# Altium PCB PCB1.PcbDoc
Units mil, origin at the board's own origin, x right, y up, seen from the top; angles counter-clockwise.
Board outline 6000 x 4000 mil, 2 copper layers (Top Layer, Bottom Layer); 1 components, 0 nets, 32 pads, 0 vias.
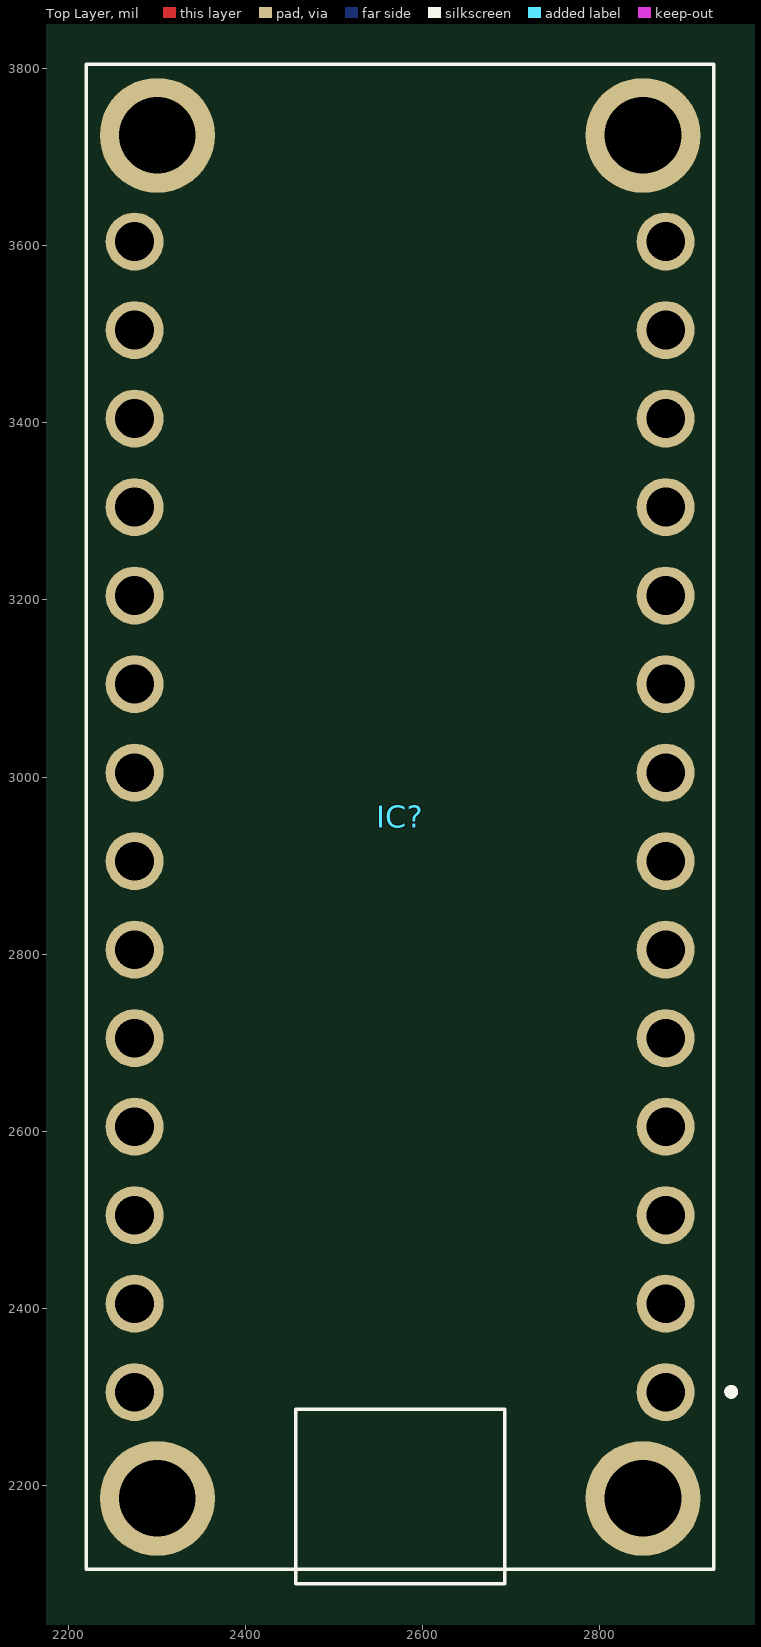
[diagram p0: Top Layer view]
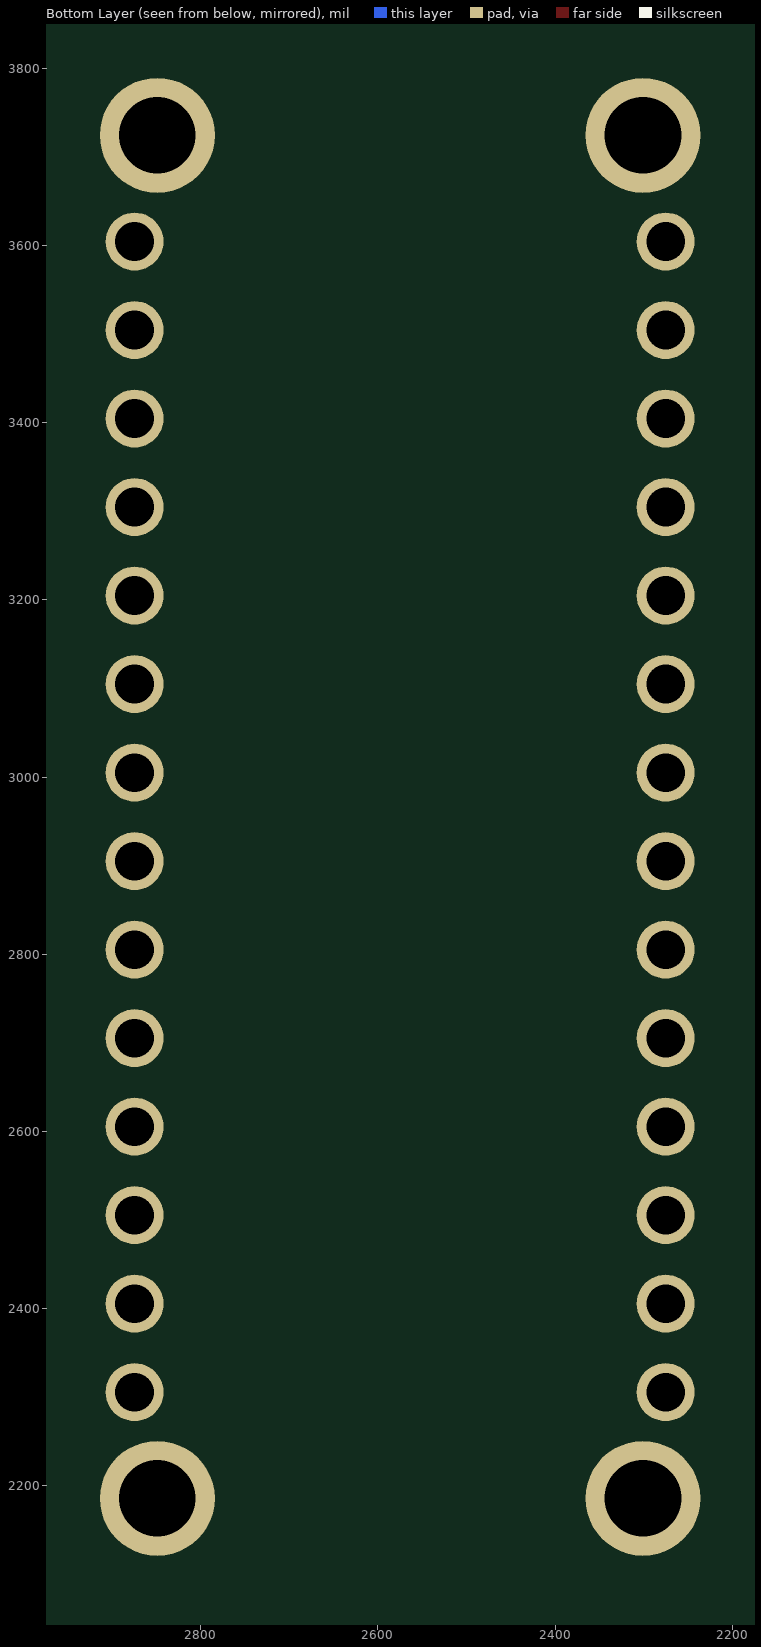
[diagram p1: Bottom Layer view, seen from below]

## Layer stack, top to bottom
Top Solder: solder mask 0.4, Solder Resist, Dk 3.5
Top Layer: signal copper 1.4
Dielectric 1: dielectric 12.6, FR-4, Dk 4.8
Bottom Layer: signal copper 1.4
Bottom Solder: solder mask 0.4, Solder Resist, Dk 3.5

## Board outline
1000,1000 7000,1000 7000,5000 1000,5000

## Design rules (kind name [scope] priority, off if disabled: settings)
Clearance [All] p1: gap=10 ignorepadtopadclearanceinfootprint=FALSE except(0: Arc-Hole Track-Hole SMDPad-Hole THPad-Hole Via-Hole Fill-Hole Poly-Hole Region-Hole Text-Hole)
PolygonConnect [All] p1: connectstyle=Relief reliefconductorwidth=10 reliefentries=4 polygonreliefangle="90 Angle" airgapwidth=10
RoutingVias [All] p1: holewidth=28 width=50 viastyle="Through Hole" minholewidth=28 minwidth=50 maxholewidth=28 maxwidth=50
SolderMaskExpansion [All] p1: expansion=4 istentingtop=FALSE
Width [All] p1: maxlimit=10 minlimit=10 preferedwidth=10
30 further rules are at their usual default settings.

## Components (designator, comment, footprint, x,y, rotation, side; value= is the part's Value field where it differs from the comment)
IC? "2590" 2590 2575,2955 r90 top

## Footprints (in the part's own frame and the unit in brackets; to place one, negate y for a bottom-side part, rotate by r counter-clockwise, add the part's x,y. Pads: shape width x height; smd on the part's side, far side on the other; paste and mask are expansions set on the pad)
2590 [mm]
  round 1.665 hole 1.11: 1(-16.51,-7.62) 2(-13.97,-7.62) 3(-11.43,-7.62) 4(-8.89,-7.62) 5(-6.35,-7.62) 6(-3.81,-7.62) 7(-1.27,-7.62) 8(1.27,-7.62) 9(3.81,-7.62) 10(6.35,-7.62) 11(8.89,-7.62) 12(11.43,-7.62) 13(13.97,-7.62) 14(16.51,-7.62) 15(16.51,7.62) 16(13.97,7.62) 17(11.43,7.62) 18(8.89,7.62) 19(6.35,7.62) 20(3.81,7.62) 21(1.27,7.62) 22(-1.27,7.62) 23(-3.81,7.62) 24(-6.35,7.62) 25(-8.89,7.62) 26(-11.43,7.62) 27(-13.97,7.62) 28(-16.51,7.62)
  round 3.3 hole 2.2: MH1(-19.558,6.968) MH2(-19.558,-6.968) MH3(19.558,-6.968) MH4(19.558,6.968)
  silkscreen extent -22,-9.6 21.59,9, body extent -22,-9 21.59,9, height 4.1

## Part data
IC?: "Integrated Circuit", Manufacturer_Name=Adafruit, Mouser Part Number=485-2590, Arrow Part Number=2590, Arrow Price/Stock=https://www.arrow.com/en/products/2590/adafruit-industries?region=nac, Datasheet Link=https://www.adafruit.com/product/2590, Height=4mm, Manufacturer_Part_Number=2590, Mouser Price/Stock=https://www.mouser.co.uk/ProductDetail/Adafruit/2590?qs=SElPoaY2y5ItxXNUVAmsXw%3D%3D

## Nets (pads, with @x,y where several pads share a name; then routed paths per layer and width w, separated by ;. In a path a pad name is that pad's centre, name@x,y a point inside that pad or via, vN(x,y) a via of type N, cw(c..) or ccw(c..) an arc to the next point about the centre after c; other vN are vias at no path point)
pads on no net: IC?.1 IC?.2 IC?.3 IC?.4 IC?.5 IC?.6 IC?.7 IC?.8 IC?.9 IC?.10 IC?.11 IC?.12 IC?.13 IC?.14 IC?.15 IC?.16 IC?.17 IC?.18 IC?.19 IC?.20 IC?.21 IC?.22 IC?.23 IC?.24 IC?.25 IC?.26 IC?.27 IC?.28 IC?.MH1 IC?.MH2 IC?.MH3 IC?.MH4